# Altium PCB PCB1.PcbDoc
Units mil, origin at the board's own origin, x right, y up, seen from the top; angles counter-clockwise.
Board outline 3365 x 2190 mil, 2 copper layers (Top Layer, Bottom Layer); 117 components, 115 nets, 487 pads, 4 vias.
Unrouted connection lines stored in the file: 334.
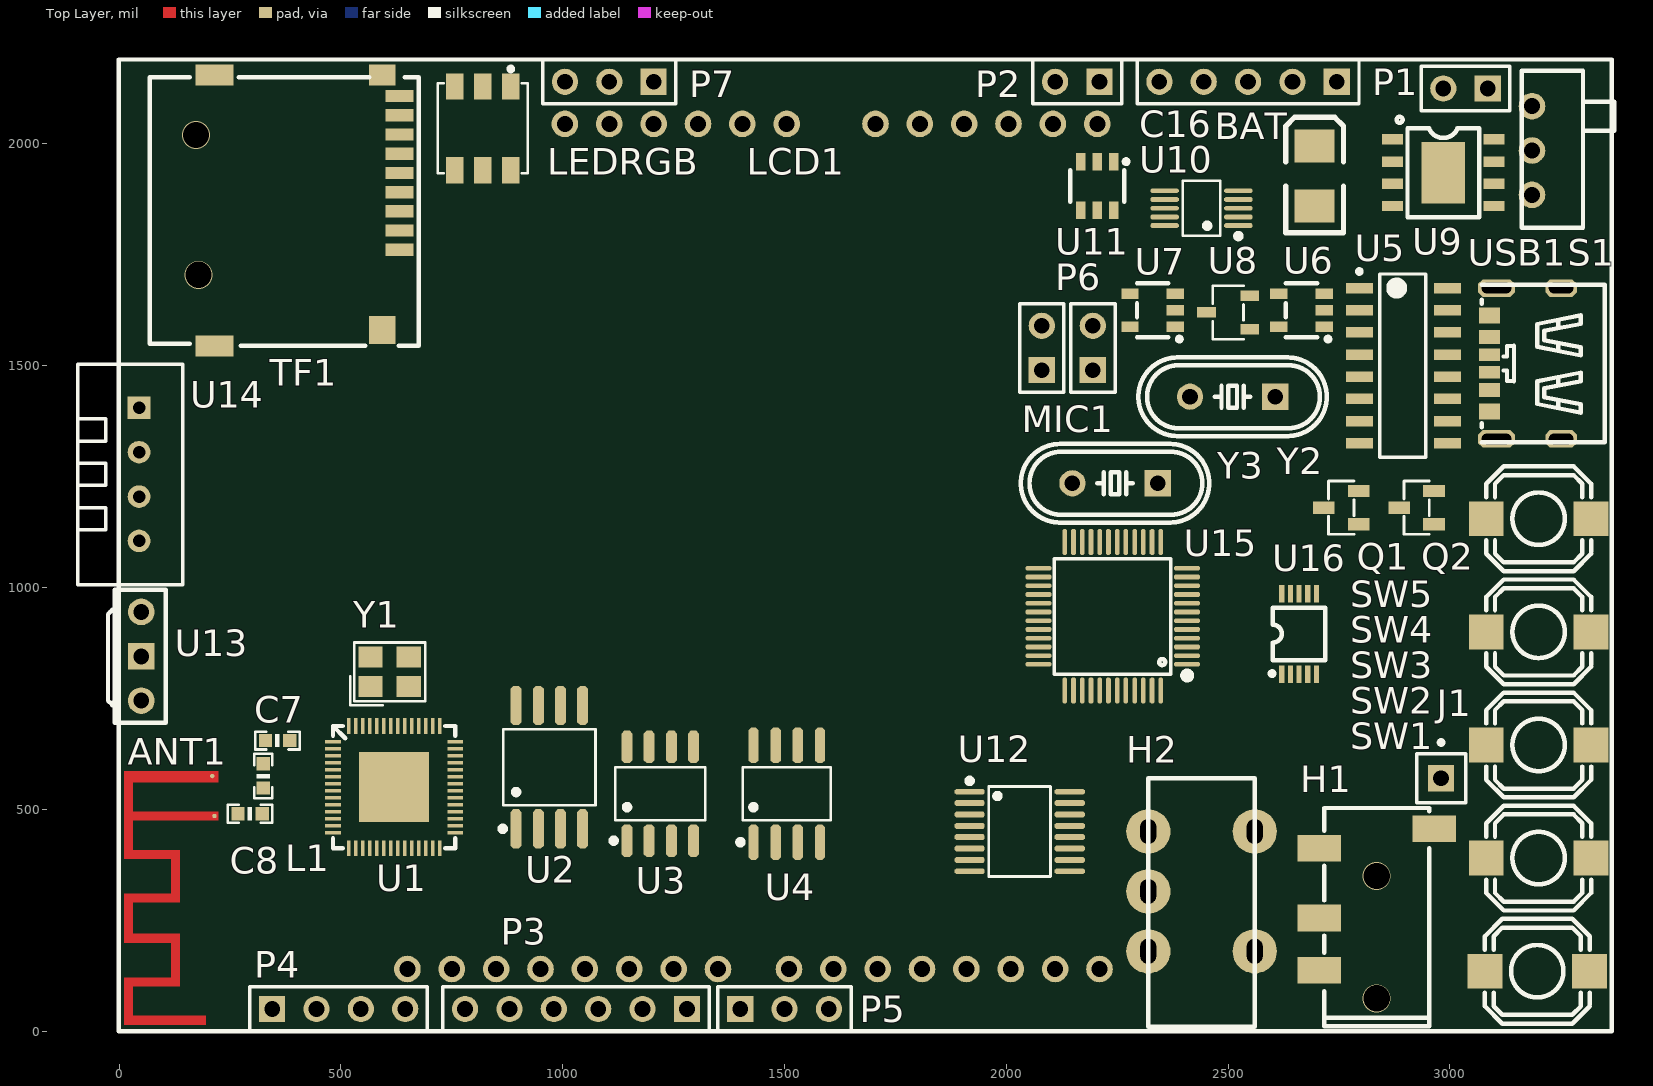
[diagram p0: Top Layer view]
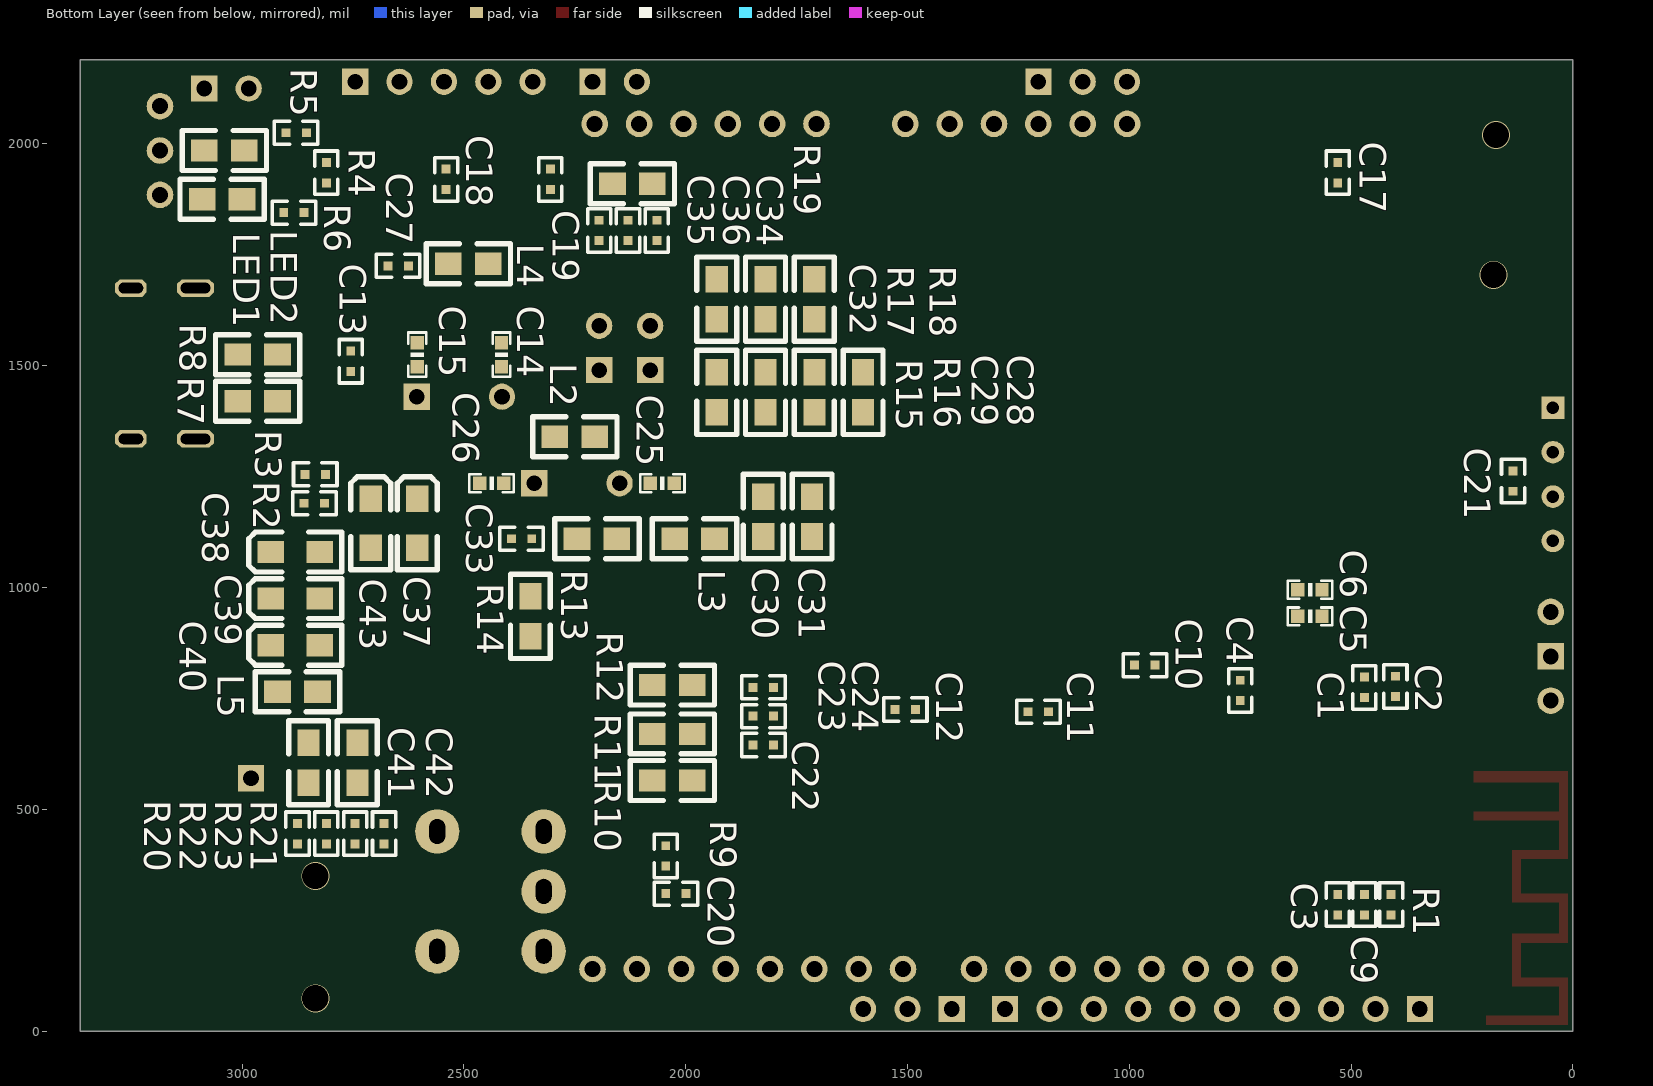
[diagram p1: Bottom Layer view, seen from below]

## Layer stack, top to bottom
Top Solder: solder mask 0.4, Solder Resist, Dk 3.5
Top Layer: signal copper 1.4
Dielectric 1: dielectric 12.6, FR-4, Dk 4.8
Bottom Layer: signal copper 1.4
Bottom Solder: solder mask 0.4, Solder Resist, Dk 3.5

## Board outline
0,0 0,2190 3365,2190 3365,0

## Design rules (kind name [scope] priority, off if disabled: settings)
Clearance [All] p1: gap=5 ignorepadtopadclearanceinfootprint=FALSE
ComponentClearance [All] p1: gap=0 collisioncheckmode=3 verticalgap=0 showdistances=FALSE
PolygonConnect [All] p1: connectstyle=Relief reliefconductorwidth=10 reliefentries=4 polygonreliefangle="90 Angle" airgapwidth=10
RoutingVias [All] p1: holewidth=28 width=23.62 viastyle="Through Hole" minholewidth=11.81 minwidth=19.68 maxholewidth=11.81 maxwidth=50
SolderMaskExpansion [All] p1: expansion=4 istentingtop=FALSE
UnRoutedNet [All] p1: checkbadconnections=TRUE
Width [All] p1: maxlimit=20 minlimit=6 preferedwidth=8
28 further rules are at their usual default settings.

## Classes and differential pairs
component class 3_AUDIO: C22 C23 C24 C25 C26 C27 C28 C29 C30 C31 C32 C33 C34 C35 C36 C37 C38 C39 C40 C41 C42 C43 H1 H2 L2 L3 L4 L5 MIC1 P6 R10 R11 R12 R13 R14 R15 R16 R17 R18 R19 R20 R21 R22 R23 U15 U16 Y3
component class 2_MODUE: BAT C16 C17 C18 C19 C20 C21 LCD1 LED1 LED2 P1 P2 R4 R5 R6 R7 R8 R9 S1 TF1 U6 U7 U8 U9 U10 U11 U12 U13 U14 USB1
component class 1_MCU: ANT1 C1 C2 C3 C4 C5 C6 C7 C8 C9 C10 C11 C12 C13 C14 C15 J1 L1 LEDRGB P3 P4 P5 P7 Q1 Q2 R1 R2 R3 SW1 SW2 SW3 SW4 SW5 U1 U2 U3 U4 U5 Y1 Y2

## Components (designator, comment, footprint, x,y, rotation, side; value= is the part's Value field where it differs from the comment)
ANT1 "ANT" MINI_ANT 215,485 r0 top
BAT "Header 2" HDR1X2 3085,2125 r180 top
C1 "104" 0402R 470,775 r270 bottom
C2 "104" 0402R 400,777 r270 bottom
C3 "104" 0402R 530,285 r90 bottom
C4 "104" 0402R 750,768 r90 bottom
C5 "10pf" 0603 592.5,934.94 r0 bottom
C6 "10pf" 0603 592.5,994.94 r0 bottom
C7 "10pf" 0603 357,655 r0 top
C8 "10pf" 0603 295,490 r0 top
C9 "104" 0402R 470,285 r90 bottom
C10 "104" 0402R 965,825 r180 bottom
C11 "104" 0402R 1205,720 r180 bottom
C12 "104" 0402R 1505,725 r180 bottom
C13 "104" 0402R 2755,1510 r270 bottom
C14 "10pf" 0603 2415,1525 r270 bottom
C15 "10pf" 0603 2605,1525 r270 bottom
C16 "100uf" 3528 2695,1860 r90 top
C17 "104" 0402R 530,1935 r90 bottom
C18 "104" 0402R 2540,1920 r90 bottom
C19 "104" 0402R 2305,1920 r270 bottom
C20 "104" 0402R 2022,310 r0 bottom
C21 "104" 0402R 135,1240 r90 bottom
C22 "104" 0402R 1825,645 r0 bottom
C23 "104" 0402R 1825,710 r0 bottom
C24 "104" 0402R 1825,775 r0 bottom
C25 "10pf" 0603 2052.5,1234.94 r0 bottom
C26 "10pf" 0603 2437.5,1235.06 r180 bottom
C27 "104" 0402R 2648,1725 r180 bottom
C28 "10uf" 0805 1599.94,1485 r270 bottom
C29 "10uf" 0805 1710,1395 r90 bottom
C30 "10uf" 0805 1825,1205 r270 bottom
C31 "10uf" 0805 1714.94,1205 r270 bottom
C32 "10uf" 0805 1930.06,1605 r90 bottom
C33 "104" 0402R 2370,1110 r180 bottom
C34 "104" 0402R 2065,1805 r270 bottom
C35 "104" 0402R 2195,1805 r270 bottom
C36 "104" 0402R 2130,1805 r90 bottom
C37 "10uf" 3216 2605,1090 r90 bottom
C38 "10uf" 3216 2825,1080 r0 bottom
C39 "100nf" 3216 2825,975 r0 bottom
C40 "10uf" 3216 2825,870 r0 bottom
C41 "2.2uf" 0805 2850,650 r270 bottom
C42 "2.2uf" 0805 2740,650 r270 bottom
C43 "100nf" 3216 2710,1090 r90 bottom
H1 "3.5mm_DIP" PJ320D 2834.9,10.9 r90 top
H2 "3.5mm_DIP1" TRS 2560,10 r90 top
J1 "Socket" PIN1 2980,570 r0 top
L1 "Inductance" 0603 325,575 r90 top
L2 "Inductance" 0805 2295,1340.06 r180 bottom
L3 "Inductance" 0805 1935,1109.94 r0 bottom
L4 "Inductance" 0805 2535,1730 r180 bottom
L5 "Inductance" 0805 2920,765.13 r180 bottom
LCD1 "MAR3501" MAR3501 3365,0 r180 top locked
LED1 "L-C292WDT-5A-YY" 0805 2995,1984.94 r0 bottom
LED2 "L-C292WDT-5A-YY" 0805 3000,1875 r0 bottom
LEDRGB "WS2812" LED-SMD_6P-L5.0-W5.0-TL 820,2035 r270 top
MIC1 "Header 2" HDR1X2 2080,1490 r90 top
P1 "Header 5" HDR1X5 2745,2140 r180 top
P2 "Header 2" HDR1X2 2210,2140 r180 top
P3 "Header 6" HDR1X6 1280,50 r180 top
P4 "Header 4" HDR1X4 345,50 r0 top
P5 "Header 3" HDR1X3 1400,50 r0 top
P6 "Header 2" HDR1X2 2195,1490 r90 top
P7 "Header 3" HDR1X3 1205,2140 r180 top
Q1 "NPN" SOT-23-3_L2.9-W1.3-P1.90-LS2.4-BR 2755,1180 r0 top
Q2 "NPN" SOT-23-3_L2.9-W1.3-P1.90-LS2.4-BR 2925,1180 r0 top
R1 "10K" 0402R 410,285 r270 bottom
R2 "1K" 0402R 2837,1190 r180 bottom
R3 "1K" 0402R 2835,1255 r0 bottom
R4 "1K" 0402R 2810,1935 r90 bottom
R5 "10K" 0402R 2878,2025 r180 bottom
R6 "10K" 0402R 2883,1845 r180 bottom
R7 "10K" 0805 3010,1420.06 r180 bottom
R8 "10K" 0805 3010,1525 r180 bottom
R9 "10K" 0402R 2045,395 r90 bottom
R10 "22" 0805 1985,565 r0 bottom
R11 "22" 0805 1985,669.94 r0 bottom
R12 "22" 0805 1985,779.94 r0 bottom
R13 "0" 0805 2245,1110.06 r180 bottom
R14 "0" 0805 2350.06,890 r90 bottom
R15 "1K" 0805 1929.94,1485 r270 bottom
R16 "1K" 0805 1820.06,1395 r90 bottom
R17 "1K" 0805 1820.06,1605 r90 bottom
R18 "1K" 0805 1710.06,1605 r90 bottom
R19 "1K" 0805 2165,1910.06 r180 bottom
R20 "10K" 0402R 2875,445 r270 bottom
R21 "10K" 0402R 2680,445 r270 bottom
R22 "1K" 0402R 2810,445 r270 bottom
R23 "1K" 0402R 2745,445 r270 bottom
S1 "MSK-12D19" MSK-12D19 3300,2165 r270 top
SW1 "无声微动开关" SW-SMD_L6.0-W6.0-P6.00-LS6.6 3196.9,135 r180 top
SW2 "无声微动开关" SW-SMD_L6.0-W6.0-P6.00-LS6.6 3200,390 r180 top
SW3 "无声微动开关" SW-SMD_L6.0-W6.0-P6.00-LS6.6 3200,645 r180 top
SW4 "无声微动开关" SW-SMD_L6.0-W6.0-P6.00-LS6.6 3200,900 r180 top
SW5 "无声微动开关" SW-SMD_L6.0-W6.0-P6.00-LS6.6 3200,1155 r180 top
TF1 "TF" TF-SMD_XKTF-N02-N_1 423.7,1849.9 r270 top
U1 "ESP32S3" ESP32-S3-QFN56 620,550 r0 top
U2 "W25Q128" SOIC-8_L5.3-W5.3-P1.27-LS8.0-BL 970,595 r0 top
U3 "APS6404L" SOP-8_L4.9-W3.9-P1.27-LS6.0-BL 1220,535 r0 top
U4 "AT24C128C" SOIC-8_L4.9-W3.9-P1.27-LS6.0-BL 1505,535 r0 top
U5 "CH340G" CH340G 2895,1500 r0 top
U6 "SGM2028" SOT-23-5_L3.0-W1.7-P0.95-LS2.8-BR 2665,1625 r0 top
U7 "SGM2028" SOT-23-5_L3.0-W1.7-P0.95-LS2.8-BR 2330,1625 r0 top
U8 "XC6206P182MR" SOT-23-3_L2.9-W1.6-P1.90-LS2.8-BR 2500,1620 r0 top
U9 "TP4056" ESOP-8_L4.9-W3.9-P1.27-LS6.0-BL-EP 2985,1935 r270 top
U10 "ADS1115IDGSR" MSOP-10_L3.0-W3.0-P0.50-LS5.0-BL 2440,1855 r90 top
U11 "MCP4725A0T" SOT-23-6_L2.9-W1.6-P0.95-LS2.8-BR 2205,1905 r90 top
U12 "XPT2046" TSSOP-16_L5.0-W4.4-P0.65-LS6.4-BL 2030,450 r270 top
U13 "HX1838" HX1838 50,945 r270 top
U14 "DHT11" SENSOR-TH_DHT11 37.1,1255 r270 top
U15 "VS1053B" LQFP-48_L7.0-W7.0-P0.50-LS9.0-BL 2240,935 r90 top
U16 "CS4344-CZZ" TSSOP-10_L3.0-W3.0-P0.50-LS4.9-BL 2660,895 r0 top
USB1 "KH-TYPE-C-6P" TYPE-C-SMD_TYPE-C-31-M-16 3170,1505 r90 top
Y1 "CRYSTAL1" CRYSTAL-SMD_4P-L3.2-W2.5-BL 610,810 r0 top
Y2 "12M" HC-49US_L11.5-W4.5-P4.88 2510,1430 r180 top
Y3 "12.882M" HC-49US_L11.5-W4.5-P4.88 2245,1235 r180 top

## Footprints (in the part's own frame and the unit in brackets; to place one, negate y for a bottom-side part, rotate by r counter-clockwise, add the part's x,y. Pads: shape width x height; smd on the part's side, far side on the other; paste and mask are expansions set on the pad)
0402R [mil]
  rect 20x20 smd: 1(-23,0) 2(23,0)
  silkscreen extent -49,-26 49,26
0603 [mil]
  rect 30x30 smd: 1(-27,0) 2(27.5,-0.06)
  silkscreen extent -50,-20 50,20
0805 [mil]
  rect 60x50 smd: 1(0,-0.06) 2(90,-0.06)
  silkscreen extent -50,-45 140,45
3216 [mil]
  rect 60x50 smd: 1(0,0) 2(110,0)
  silkscreen extent -50,-45 160,45
3528 [mil]
  rect 75x90 smd: 1(0,0) 2(135,0)
  silkscreen extent -60,-65 200,65
CH340G [mm]
  rect 1.55x0.6 smd: 1(-2.521,4.445) 2(-2.521,3.175) 3(-2.521,1.905) 4(-2.521,0.635) 5(-2.521,-0.635) 6(-2.521,-1.905) 7(-2.521,-3.175) 8(-2.521,-4.445) 9(2.521,-4.445) 10(2.521,-3.175) 11(2.521,-1.905) 12(2.521,-0.635) 13(2.521,0.635) 14(2.521,1.905) 15(2.521,3.175) 16(2.521,4.445)
  silkscreen extent -2.65,-5.25 1.27,5.52
CRYSTAL-SMD_4P-L3.2-W2.5-BL [mil]
  rect 55.1x47.2 smd mask+2: 1(-43.3,-33.5) 2(43.3,-33.5) 3(43.3,33.5) 4(-43.3,33.5)
  silkscreen extent -89,-75 80,66
ESOP-8_L4.9-W3.9-P1.27-LS6.0-BL-EP [mil]
  rect 23.6x47.2 smd mask+2: 1(-75,-114.5) 2(-25,-114.5) 3(25,-114.5) 4(75,-114.5) 5(75,114.5) 6(25,114.5) 7(-25,114.5) 8(-75,114.5)
  rect 137.8x98.4 smd mask+2: 9(0,0)
  silkscreen extent -126,-105 100,81
ESP32-S3-QFN56 [mil]
  rect 35.4x7.9 smd mask+2: 1(-137.8,102.4) 2(-137.8,86.6) 3(-137.8,70.9) 4(-137.8,55.1) 5(-137.8,39.4) 6(-137.8,23.6) 7(-137.8,7.9) 8(-137.8,-7.9) 9(-137.8,-23.6) 10(-137.8,-39.4) 11(-137.8,-55.1) 12(-137.8,-70.9) 13(-137.8,-86.6) 14(-137.8,-102.4) 29(137.8,-102.4) 30(137.8,-86.6) 31(137.8,-70.9) 32(137.8,-55.1) 33(137.8,-39.4) 34(137.8,-23.6) 35(137.8,-7.9) 36(137.8,7.9) 37(137.8,23.6) 38(137.8,39.4) 39(137.8,55.1) 40(137.8,70.9) 41(137.8,102.4) 42(137.8,86.6)
  rect 7.9x35.4 smd mask+2: 15(-102.4,-137.8) 16(-86.6,-137.8) 17(-70.9,-137.8) 18(-55.1,-137.8) 19(-39.4,-137.8) 20(-23.6,-137.8) 21(-7.9,-137.8) 22(7.9,-137.8) 23(23.6,-137.8) 24(39.4,-137.8) 25(55.1,-137.8) 26(70.9,-137.8) 27(86.6,-137.8) 28(102.4,-137.8) 43(102.4,137.8) 44(86.6,137.8) 45(70.9,137.8) 46(55.1,137.8) 47(39.4,137.8) 48(23.6,137.8) 49(7.9,137.8) 50(-7.9,137.8) 51(-23.6,137.8) 52(-39.4,137.8) 53(-55.1,137.8) 54(-70.9,137.8) 55(-86.6,137.8) 56(-102.4,137.8)
  rect 157.5x157.5 smd mask+2: 57(0,0)
  silkscreen extent -138,-138 138,138
HC-49US_L11.5-W4.5-P4.88 [mil]
  rect 59.1x59.1 hole 35.4 mask+2: 1(-96.1,0)
  round 59.1 hole 35.4 mask+2: 2(96.1,0)
  silkscreen extent -212,-89 212,89
HDR1X2 [mm] "Connector; Header; 2 Position"
  rect 1.5x1.5 hole 0.9: 1(0,0)
  round 1.5 hole 0.9: 2(2.54,0)
  silkscreen extent -1.27,-1.27 3.81,1.27
HDR1X3 [mm] "Connector; Header; 3 Position"
  rect 1.5x1.5 hole 0.9: 1(0,0)
  round 1.5 hole 0.9: 2(2.54,0) 3(5.08,0)
  silkscreen extent -1.27,-1.27 6.35,1.27
HDR1X4 [mm] "Connector; Header; 4 Position"
  rect 1.5x1.5 hole 0.9: 1(0,0)
  round 1.5 hole 0.9: 2(2.54,0) 3(5.08,0) 4(7.62,0)
  silkscreen extent -1.27,-1.27 8.89,1.27
HDR1X5 [mm] "Connector; Header; 5 Position"
  rect 1.5x1.5 hole 0.9: 1(0,0)
  round 1.5 hole 0.9: 2(2.54,0) 3(5.08,0) 4(7.62,0) 5(10.16,0)
  silkscreen extent -1.27,-1.27 11.43,1.27
HDR1X6 [mm] "Connector; Header; 6 Position"
  rect 1.5x1.5 hole 0.9: 1(0,0)
  round 1.5 hole 0.9: 2(2.54,0) 3(5.08,0) 4(7.62,0) 5(10.16,0) 6(12.7,0)
  silkscreen extent -1.27,-1.27 13.97,1.27
HX1838 [mil]
  round 60 hole 36 mask+4: 1(0,0) 3(200,0)
  rect 60x60 hole 36 mask+4: 2(100,0)
  silkscreen extent -50,-75 250,55
LED-SMD_6P-L5.0-W5.0-TL [mil]
  rect 59.1x39.4 smd mask+2: 1(-94.5,63) 2(-94.5,0) 3(-94.5,-63) 4(94.5,-63) 5(94.5,0) 6(94.5,63)
  silkscreen extent -139,-101 101,101
LQFP-48_L7.0-W7.0-P0.50-LS9.0-BL [mil]
  oct 10.6x59.1 smd mask+1.97: 1(-108.3,-167.3) 2(-88.6,-167.3) 3(-68.9,-167.3) 4(-49.2,-167.3) 5(-29.5,-167.3) 6(-9.8,-167.3) 7(9.8,-167.3) 8(29.5,-167.3) 9(49.2,-167.3) 10(68.9,-167.3) 11(88.6,-167.3) 12(108.3,-167.3) 25(108.3,167.3) 26(88.6,167.3) 27(68.9,167.3) 28(49.2,167.3) 29(29.5,167.3) 30(9.8,167.3) 31(-9.8,167.3) 32(-29.5,167.3) 33(-49.2,167.3) 34(-68.9,167.3) 35(-88.6,167.3) 36(-108.3,167.3)
  oct 59.1x10.6 smd mask+1.97: 13(167.3,-108.3) 14(167.3,-88.6) 15(167.3,-68.9) 16(167.3,-49.2) 17(167.3,-29.5) 18(167.3,-9.8) 19(167.3,9.8) 20(167.3,29.5) 21(167.3,49.2) 22(167.3,68.9) 23(167.3,88.6) 24(167.3,108.3) 37(-167.3,108.3) 38(-167.3,88.6) 39(-167.3,68.9) 40(-167.3,49.2) 41(-167.3,29.5) 42(-167.3,9.8) 43(-167.3,-9.8) 44(-167.3,-29.5) 45(-167.3,-49.2) 46(-167.3,-68.9) 47(-167.3,-88.6) 48(-167.3,-108.3)
  silkscreen extent -141,-176 130,132
MAR3501 [mil]
  round 60 hole 36 mask+4: 1(1155,-140) 2(1255,-140) 3(1355,-140) 4(1455,-140) 5(1555,-140) 6(1655,-140) 7(1755,-140) 8(1855,-140) 9(2015,-140) 10(2115,-140) 11(2215,-140) 12(2315,-140) 13(2415,-140) 14(2515,-140) 15(2615,-140) 16(2715,-140) 17(2360,-2045) 18(2260,-2045) 19(2160,-2045) 20(2060,-2045) 21(1960,-2045) 22(1860,-2045) 23(1660,-2045) 24(1560,-2045) 25(1460,-2045) 26(1360,-2045) 27(1260,-2045) 28(1160,-2045)
  silkscreen extent 0,-2190 3366,0
MINI_ANT [mil]
  round 10 smd: 1(0,0) 2(-5,90)
  Top Layer region: -184,100.4 -203.7,100.4 -203.7,-96.5 -97.4,-96.5 -97.4,-175.2 -203.7,-175.2 -203.7,-285.5 -97.4,-285.5 -97.4,-364.2 -203.7,-364.2 -203.7,-470.5 -19.7,-470.5 -19.7,-450.8 -184,-450.8 -184,-383.9 -77.7,-383.9 -77.7,-265.8 -184,-265.8 -184,-194.9 -77.7,-194.9 -77.7,-76.8 -184,-76.8 -184,-9.9 8.9,-9.9 8.9,9.8 -184,9.8 -184,100.4
  Top Layer region: -193.9,100.3 8.9,100.3 8.9,75.7 -193.9,75.7 -193.9,100.3
MSK-12D19 [mil]
  round 60 hole 36 mask+4: 1(80,-115) 2(180,-115) 3(280,-115)
  silkscreen extent 0,-138 354,70
MSOP-10_L3.0-W3.0-P0.50-LS5.0-BL [mil]
  oct 11x63.8 smd mask+2: 1(-39.4,-83.1) 2(-19.7,-83.1) 3(0,-83.1) 4(19.7,-83.1) 5(39.4,-83.1) 6(39.4,83.1) 7(19.7,83.1) 8(0,83.1) 9(-19.7,83.1) 10(-39.4,83.1)
  silkscreen extent -69,-89 62,42
PIN1 [mm] "Connector; Plug"
  rect 1.5x1.5 hole 0.9: 1(0,0)
  silkscreen extent -1.4,-1.4 1.4,2.17
PJ320D [mil]
  rect 60x98.4 smd mask+4: 1(401.6,129.9) 2(244.1,129.9) 3(126,129.9) 4(444.9,-129.9)
  silkscreen extent 0,-118 492,118
SENSOR-TH_DHT11 [mil]
  rect 51x51 hole 28 mask+2: 1(-150,7.9)
  round 51 hole 28 mask+2: 2(-50,7.9) 3(50,7.9) 4(150,7.9)
  silkscreen extent -248,-130 248,106
SOIC-8_L4.9-W3.9-P1.27-LS6.0-BL [mil]
  oct 23.2x80.5 smd mask+2: 1(-75,-109.1) 2(-25,-109.1) 3(25,-109.1) 4(75,-109.1) 5(75,109.2) 6(25,109.2) 7(-25,109.2) 8(-75,109.2)
  silkscreen extent -110,-115 100,60
SOIC-8_L5.3-W5.3-P1.27-LS8.0-BL [mil]
  oct 24.8x88.6 smd mask+2: 1(-75,-139) 2(-25,-139) 3(25,-139) 4(75,-139) 5(75,139) 6(25,139) 7(-25,139) 8(-75,139)
  silkscreen extent -111,-145 104,86
SOP-8_L4.9-W3.9-P1.27-LS6.0-BL [mil]
  oct 24.8x73.4 smd mask+2: 1(-75,-105.6) 2(-25,-105.6) 3(25,-105.6) 4(75,-105.6) 5(75,105.6) 6(25,105.6) 7(-25,105.6) 8(-75,105.6)
  silkscreen extent -111,-111 101,60
SOT-23-3_L2.9-W1.3-P1.90-LS2.4-BR [mil]
  rect 49.2x27.6 smd mask+2: 1(39.4,-37.4) 2(39.4,37.4) 3(-39.4,0)
  silkscreen extent -29,-60 29,60
SOT-23-3_L2.9-W1.6-P1.90-LS2.8-BR [mil]
  rect 42.1x23.6 smd mask+2: 1(48.6,-37.4) 2(48.6,37.4) 3(-48.6,0)
  silkscreen extent -34,-60 34,60
SOT-23-5_L3.0-W1.7-P0.95-LS2.8-BR [mil]
  rect 39.4x23.6 smd mask+2: 1(51.2,-37.4) 2(51.2,0) 3(51.2,37.4) 4(-51.2,37.4) 5(-51.2,-37.4)
  silkscreen extent -35,-70 65,61
SOT-23-6_L2.9-W1.6-P0.95-LS2.8-BR [mil]
  rect 39.4x21.7 smd mask+2: 1(55.1,-37.4) 2(55.1,0) 3(55.1,37.4) 4(-55.1,37.4) 5(-55.1,0) 6(-55.1,-37.4)
  silkscreen extent -35,-70 60,61
SW-SMD_L6.0-W6.0-P6.00-LS6.6 [mil]
  rect 78.7x78.7 smd mask+2: 1(-118.1,0) 2(118.1,0)
  silkscreen extent -118,-118 118,118
TF-SMD_XKTF-N02-N_1 [mil]
  rect 27.6x63 smd mask+2: 1(88.6,208.7) 2(45.3,208.7) 3(2,208.7) 4(-41.3,208.7) 5(-84.6,208.7) 6(-128,208.7) 7(-171.3,208.7) 8(-214.6,208.7) 9(-257.9,208.7)
  rect 47.2x59.1 smd mask+2: 10(-305.1,169.3)
  rect 47.2x86.6 smd mask+2: 11(-305.1,-208.7) 13(305.1,-208.7)
  rect 63x59.1 smd mask+2: 12(269.7,169.3)
  silkscreen extent -300,-354 305,252
TRS [mil]
  round 100 hole 36 slot 56 at 0 deg mask+10: 1(170,240) 1(170,0) 2(305,240) 3(440,0) 3(440,240)
  silkscreen extent 0,0 560,240
TSSOP-10_L3.0-W3.0-P0.50-LS4.9-BL [mil]
  rect 11.8x39.4 smd mask+2: 1(-39.4,-90.5) 2(-19.7,-90.5) 3(0,-90.5) 4(19.7,-90.5) 5(39.4,-90.5) 6(39.4,90.6) 7(19.7,90.6) 8(0,90.6) 9(-19.7,90.6) 10(-39.4,90.6)
  silkscreen extent -66,-94 59,59
TSSOP-16_L5.0-W4.4-P0.65-LS6.4-BL [mil]
  oct 13.5x68.2 smd mask+2: 1(-89.6,-112.8) 2(-64,-112.8) 3(-38.4,-112.8) 4(-12.8,-112.8) 5(12.8,-112.8) 6(38.4,-112.8) 7(64,-112.8) 8(89.6,-112.8) 9(89.6,112.8) 10(64,112.8) 11(38.4,112.8) 12(12.8,112.8) 13(-12.8,112.8) 14(-38.4,112.8) 15(-64,112.8) 16(-89.6,112.8)
  silkscreen extent -120,-119 101,70
TYPE-C-SMD_TYPE-C-31-M-16 [mil]
  oct 39.4x82.7 hole 23.6 slot 66.9 at 90 deg mask+2: 1(-170.1,65) 2(170.1,65)
  oct 39.4x70.9 hole 23.6 slot 55.1 at 90 deg mask+2: 3(-170.1,-80.7) 4(170.1,-80.7)
  rect 27.6x47.2 smd mask+2: A5(-19.7,80.7) B5(19.7,80.7)
  rect 31.5x47.2 smd mask+2: A9(59.8,80.7) B9(-59.8,80.7)
  rect 35.4x47.2 smd mask+2: A12(108.3,80.7) B12(-108.3,80.7)
  silkscreen extent -177,-179 177,98

## Part data
ANT1: library part "Header 2", LatestRevisionDate=17-Jul-2002, LatestRevisionNote="Re-released for DXP Platform.", Publisher="Altium Limited"
BAT MIC1 P2 P6: "Header, 2-Pin", LatestRevisionDate=17-Jul-2002, LatestRevisionNote="Re-released for DXP Platform.", Publisher="Altium Limited"
C1 C2 C3 C4 C5 C6 C7 C8 C9 C10 C11 C12 C13 C14 C15 C16 C17 C18 C19 C20 C21 C22 C23 C24 C25 C26 C27 C28 C29 C30 C31 C32 C33 C34 C35 C36 C37 C38 C39 C40 C41 C42 C43: library part CAP, Add into BOM=yes, Convert to PCB=yes, Device=0.1u, Origin Footprint=C0805, Symbol=0.1u
LED1 LED2: library part LED, Add into BOM=yes, Convert to PCB=yes, Device=L-C292WDT-5A-YY, Name=L-C292WDT-5A-YY, Origin Footprint=LED0805-RD, Symbol=L-C292WDT-5A-YY
P1: "Header, 5-Pin", LatestRevisionDate=17-Jul-2002, LatestRevisionNote="Re-released for DXP Platform.", Publisher="Altium Limited"
P3: "Header, 6-Pin", LatestRevisionDate=17-Jul-2002, LatestRevisionNote="Re-released for DXP Platform.", Publisher="Altium Limited"
P4: "Header, 4-Pin", LatestRevisionDate=17-Jul-2002, LatestRevisionNote="Re-released for DXP Platform.", Publisher="Altium Limited"
P5 P7: "Header, 3-Pin", LatestRevisionDate=17-Jul-2002, LatestRevisionNote="Re-released for DXP Platform.", Publisher="Altium Limited"
Q1 Q2: "NPN Bipolar Transistor", Code_JEDEC=TO-226-AA, LatestRevisionDate=17-Jul-2002, LatestRevisionNote="Re-released for DXP Platform.", PackageDescription="TO, Flat Index; 3 In-Line, Axial Leads; Body Dia. 4.8mm; Leads 0.55 x 0.51 mm (max)", PackageReference=TO-226-AA, Published=8-Jun-2000, Publisher="Altium Limited"
R1 R2 R3 R4 R5 R6 R7 R8 R9 R10 R11 R12 R13 R14 R15 R16 R17 R18 R19 R20 R21 R22 R23: library part RST, Add into BOM=yes, Convert to PCB=yes, Device=0_, Origin Footprint=R0805, Symbol=0_
SW1 SW2 SW3 SW4 SW5: library part SW, Add into BOM=yes, Convert to PCB=yes, Device=无声微动开关, Name=无声微动开关, Origin Footprint=SW-SMD_L6.0-W6.0-P6.00-LS6.6, Symbol=无声微动开关
Y2 Y3: library part CRYSTAL, Add into BOM=yes, Convert to PCB=yes, Device=9B-12.288MAAJ-B, Name=9B-12.288MAAJ-B, Origin Footprint=HC-49US_L11.5-W4.5-P4.88, Symbol=9B-12.288MAAJ-B
H1: Add into BOM=yes, Convert to PCB=yes, Device=3.5mm_DIP, Origin Footprint=PJ320D, Symbol=3.5mm_DIP
H2: Add into BOM=yes, Convert to PCB=yes, Device=TRS, Origin Footprint=TRS, Symbol=TRS
J1: LatestRevisionDate=17-Jul-2002, LatestRevisionNote="Re-released for DXP Platform.", Publisher="Altium Limited"
L1 L2 L3 L4 L5: Add into BOM=yes, Convert to PCB=yes, Device=1m, Origin Footprint=L1608, Symbol=1m
LCD1: Add into BOM=yes, Convert to PCB=yes, Device=MAR3501, Origin Footprint=MAR3501, Symbol=MAR3501
S1: Add into BOM=yes, Convert to PCB=yes, Device=MSK-12D19, Name=MSK-12D19, Origin Footprint=MSK-12D19, Symbol=MSK-12D19
TF1: Add into BOM=yes, Convert to PCB=yes, Device=TF_1, Symbol=TF_1
U1: Add into BOM=yes, Convert to PCB=yes, Device=ESP32S3, Origin Footprint=ESP32-S3-QFN56, Symbol=ESP32S3
U2: Add into BOM=yes, Convert to PCB=yes, Device=W25Q128JVSIQ, Origin Footprint=SOIC-8_L5.3-W5.3-P1.27-LS8.0-BL, Symbol=W25Q128JVSIQ
U3: Add into BOM=yes, Convert to PCB=yes, Device=APS6404L-3SQR-SN, link=https://img.jlc.com/pdf/applyPasteComponent/2021-12-06/31098A/66796366ab5e49f0a48d07582eff2f2b/APS6404L-3SQR-SN.pdf, Origin Footprint=SOP-8_L4.9-W3.9-P1.27-LS6.0-BL, Symbol=APS6404L-3SQR-SN
U4: Add into BOM=yes, Convert to PCB=yes, Device=AT24C128C-SSHM-T, Origin Footprint=SOIC-8_L4.9-W3.9-P1.27-LS6.0-BL, Symbol=AT24C128C-SSHM-T
U5: Add into BOM=yes, Convert to PCB=yes, Device=CH340G, Origin Footprint=CH340G, Symbol=CH340G
U6 U7: Add into BOM=yes, Convert to PCB=yes, Device=SGM2028-3.3YN5G/TR, Origin Footprint=SOT-23-5_L3.0-W1.7-P0.95-LS2.8-BR, Symbol=SGM2028-3.3YN5G/TR
U8: Add into BOM=yes, Convert to PCB=yes, Device=XC6206P182MR, Origin Footprint=SOT-23-3_L2.9-W1.6-P1.90-LS2.8-BR, Symbol=XC6206P182MR
U9: Add into BOM=yes, Convert to PCB=yes, Device=TP4056_C725790, Origin Footprint=ESOP-8_L4.9-W3.9-P1.27-LS6.0-BL-EP, Symbol=TP4056_C725790
U10: Add into BOM=yes, Convert to PCB=yes, Device=ADS1115IDGSR, Origin Footprint=MSOP-10_L3.0-W3.0-P0.50-LS5.0-BL, Symbol=ADS1115IDGSR
U11: Add into BOM=yes, Convert to PCB=yes, Device=MCP4725A0T-E/CH, Origin Footprint=SOT-23-6_L2.9-W1.6-P0.95-LS2.8-BR, Symbol=MCP4725A0T-E/CH
U12: Add into BOM=yes, Convert to PCB=yes, Device=XPT2046, Origin Footprint=TSSOP-16_L5.0-W4.4-P0.65-LS6.4-BL, Symbol=XPT2046
U13: Add into BOM=yes, Convert to PCB=yes, Device=HX1838, link=HX1838, Origin Footprint=HX1838, Symbol=HX1838
U14: Add into BOM=yes, Convert to PCB=yes, Device=DHT11, Origin Footprint=SENSOR-TH_DHT11, Symbol=DHT11
U15: Add into BOM=yes, Convert to PCB=yes, Device=VS1053B, Origin Footprint=LQFP-48_L7.0-W7.0-P0.50-LS9.0-BL, Symbol=VS1053B
U16: Add into BOM=yes, Convert to PCB=yes, Device=CS4344-CZZ, Origin Footprint=TSSOP-10_L3.0-W3.0-P0.50-LS4.9-BL, Symbol=CS4344-CZZ
USB1: Add into BOM=yes, Convert to PCB=yes, Device=KH-TYPE-C-6P, Name=KH-TYPE-C-6P, Origin Footprint=TYPE-C-SMD_TYPE-C-31-M-16, Symbol=KH-TYPE-C-6P
Y1: Add into BOM=yes, Convert to PCB=yes, Device=25MHZ3225无源, Name=40MHZ3225无源, Origin Footprint=CRYSTAL-SMD_4P-L3.2-W2.5-BL, Symbol=25MHZ3225无源

## Via types
v1: diameter 62.99, hole 59.06, Top Layer to Bottom Layer, 4 vias

## Nets (pads, with @x,y where several pads share a name; then routed paths per layer and width w, separated by ;. In a path a pad name is that pad's centre, name@x,y a point inside that pad or via, vN(x,y) a via of type N, cw(c..) or ccw(c..) an arc to the next point about the centre after c; other vN are vias at no path point)
AVDD: C33.2 L3.2 R13.2 R15.1 U15.38 U15.43 U15.45
CVDD: L4.2 U15.5 U15.7 U15.24 U15.31
DT_OUT: U1.23 U14.2
GND: ANT1.1 ANT1.2 BAT.2 C1.1 C2.1 C3.1 C4.2 C5.1 C6.1 C8.1 C9.1 C10.1 C11.1 C12.1 C13.1 C14.1 C15.1 C16.1 C17.2 C18.2 C19.2 C20.1 C21.1 C22.1 C23.1 C24.1 C25.1 C26.1 C27.1 C37.2 C38.2 C39.2 C40.2 C43.2 H1.3 H1.4 LCD1.21 LEDRGB.5 P1.5 P2.2 P3.2 P4.4 P5.3 P7.2 R4.1 R14.1 R20.2 R21.2 SW1.1 SW2.1 SW3.1 SW4.1 SW5.1 TF1.6 TF1.10 TF1.11 TF1.12 TF1.13 U1.57 U2.4 U3.4 U4.1 U4.3 U4.4 U4.7 U5.1 U6.2 U7.2 U8.1 U9.1 U9.3 U10.1 U10.3 U11.2 U11.6 U12.6 U13.2 U14.4 U15.35 U16.8 USB1.1 USB1.2 USB1.3 USB1.4 USB1.A12 USB1.B12 Y1.2 Y1.4
GND1: C28.1 C33.1 C35.2 C36.2 P6.1 R14.2 R18.1 U15.4 U15.16 U15.20 U15.21 U15.22 U15.37 U15.40 U15.41 U15.47
GPIO0: Q1.1 SW2.2 U1.5
GPIO3: J1.1 SW3.2 U1.8
GPIO45: SW4.2 U1.51
GPIO46: SW5.2 U1.52
I2C_SCL: P5.1 U1.37 U4.6 U10.10 U11.5
I2C_SDA: P5.2 U1.36 U4.5 U10.9 U11.4
I2S_LRCK: U1.9 U16.3
I2S_MCLK: U1.10 U16.4
I2S_SCLK: U1.7 U16.2
I2S_SDIN: U1.6 U16.1
IOVDD: R13.1 U15.6 U15.14 U15.19
IR_OUT: U1.24 U13.1
J_CK: P3.5 U1.44
J_DI: P3.4 U1.47
J_DO: P3.3 U1.45
J_MS: P3.6 U1.48
LCD_BL: LCD1.28 U1.25
LCD_CS: LCD1.26 U1.26
LCD_RD\: LCD1.23 U1.27
LED_RGB: LEDRGB.2 U1.43
MICN: C31.2 U15.2
MICP: C30.2 U15.1
NetBAT_1: BAT.1 S1.3 U9.5
NetC5_2: C5.2 U1.54 Y1.1
NetC6_2: C6.2 U1.53 Y1.3
NetC7_1: C7.1 L1.2
NetC7_2: C7.2 U1.1
NetC8_2: C8.2 L1.1
NetC14_2: C14.2 U5.8 Y2.2
NetC15_2: C15.2 U5.7 Y2.1
NetC22_2: C22.2 R10.1
NetC23_2: C23.2 R11.1
NetC24_2: C24.2 R12.1
NetC25_2: C25.2 L2.2 U15.18 Y3.2
NetC26_2: C26.2 L2.1 U15.17 Y3.1
NetC28_2: C28.2 C29.2 R15.2 R16.1
NetC29_1: C29.1 R17.2 R18.2
NetC30_1: C30.1 C32.1 MIC1.1 R16.2
NetC31_1: C31.1 C32.2 MIC1.2 R17.1
NetC34_1: C34.1 R19.2
NetC34_2: C34.2 P6.2
NetC35_1: C35.1 R19.1 U15.48
NetC36_1: C36.1 U15.44
NetC37_1: C37.1 U16.5
NetC38_1: C38.1 C39.1 C40.1 L5.2 U16.9
NetC41_1: C41.1 U16.7
NetC41_2: C41.2 R20.1 R22.1
NetC42_1: C42.1 U16.10
NetC42_2: C42.2 R21.1 R23.1
NetC43_1: C43.1 U16.6
NetH1_1: H1.1 R23.2
NetH1_2: H1.2 R22.2
NetH2_1: H2.1 R11.2 U15.42
NetH2_2: H2.2 R12.2 U15.39
NetH2_3: H2.3 R10.2 U15.46
NetLCD1_1: LCD1.1 U12.3
NetLCD1_2: LCD1.2 U12.5
NetLCD1_15: LCD1.15 U12.2
NetLCD1_16: LCD1.16 U12.4
NetLED1_1: LED1.1 R5.1
NetLED1_2: LED1.2 U9.7
NetLED2_1: LED2.1 R6.1
NetLED2_2: LED2.2 U9.6
NetLEDRGB_1: LEDRGB.1 P7.3
NetP1_1: P1.1 U10.4
NetP1_2: P1.2 U10.5
NetP1_3: P1.3 U10.6
NetP1_4: P1.4 U10.7
NetP2_1: P2.1 U11.1
NetQ1_2: Q1.2 R2.2
NetQ1_3: Q1.3 R3.1 U5.13
NetQ2_1: Q2.1 R2.1 U5.14
NetQ2_2: Q2.2 R3.2
NetR4_2: R4.2 U9.2
NetR7_1: R7.1 USB1.A5
NetR8_1: R8.1 USB1.B5
NetR9_2: R9.2 U12.11
RST: C9.2 LCD1.27 Q2.3 R1.1 SW1.2 U1.4 U15.3
RXD: U1.50 U5.2
SDIO_CLK: TF1.5 U1.21
SDIO_CMD: TF1.3 U1.22
SDIO_D0: LCD1.9 TF1.7 U1.11
SDIO_D1: LCD1.10 TF1.8 U1.12
SDIO_D2: LCD1.3 TF1.1 U1.13
SDIO_D3: LCD1.4 TF1.2 U1.14
SDIO_D4: LCD1.5 U1.38
SDIO_D5: LCD1.6 U1.39
SDIO_D6: LCD1.7 U1.40
SDIO_D7: LCD1.8 U1.41
SPI_CLK: LCD1.24 P4.1 U1.17 U12.16 U15.28
SPI_MISO: P4.3 U1.18 U12.12 U15.30
SPI_MOSI: LCD1.25 P4.2 U1.16 U12.14 U15.29
SPICLK: U1.33 U2.6 U3.6
SPICS0: U1.32 U2.1
SPICS1: U1.28 U3.1
SPID0: U1.35 U2.5 U3.5
SPID1: U1.34 U2.2 U3.2
SPID2: U1.31 U2.3 U3.3
SPID3: U1.30 U2.7 U3.7
TXD: U1.49 U5.3
USB+: R7.2 U5.5
USB-: R8.2 U5.6
VCC1.8: C27.2 L4.1 U8.2
VCC3.3: C1.2 C2.2 C3.2 C4.1 C10.2 C11.2 C12.2 C13.2 C17.1 C18.1 C19.1 C20.2 C21.2 L3.1 L5.1 LEDRGB.3 LEDRGB.6 P3.1 P7.1 R1.2 R9.1 TF1.4 U1.2 U1.3 U1.20 U1.46 U1.55 U1.56 U2.8 U3.8 U4.2 U4.8 U5.4 U5.16 U6.5 U10.8 U11.3 U12.1 U12.9 U12.10 U13.3 U14.1
VCC5V: R5.2 R6.2 U9.4 U9.8 USB1.A9 USB1.B9
VCCBAT: C16.2 S1.2 U6.1 U6.3 U7.1 U7.3 U8.3
VCCLCD: LCD1.18 U7.5
VS_CS: U1.15 U15.23
XY_BUSY: U1.42 U10.2 U12.13
XY_CS: U1.19 U12.15
pads on no net: LCD1.11 LCD1.12 LCD1.13 LCD1.14 LCD1.17 LCD1.19 LCD1.20 LCD1.22 LEDRGB.4 S1.1 TF1.9 U1.29 U5.9 U5.10 U5.11 U5.12 U5.15 U6.4 U7.4 U9.9 U12.7 U12.8 U14.3 U15.8 U15.9 U15.10 U15.11 U15.12 U15.13 U15.15 U15.25 U15.26 U15.27 U15.32 U15.33 U15.34 U15.36
copper on no net:
  other v1: 2834.9,73.9 2834.9,349.5 178.7,1704.9 173.7,2019.9

## Silkscreen, mask and mechanical layers (free items; w line width, h text height)
Mechanical 1:
  the board outline again, w10